# Altium PCB PCB.PcbDoc
Units mm, origin at the board's own origin, x right, y up, seen from the top; angles counter-clockwise.
Board outline 35.57 x 16.2 mm, 2 copper layers (Top Layer, Bottom Layer); 66 components, 58 nets, 239 pads, 104 vias.
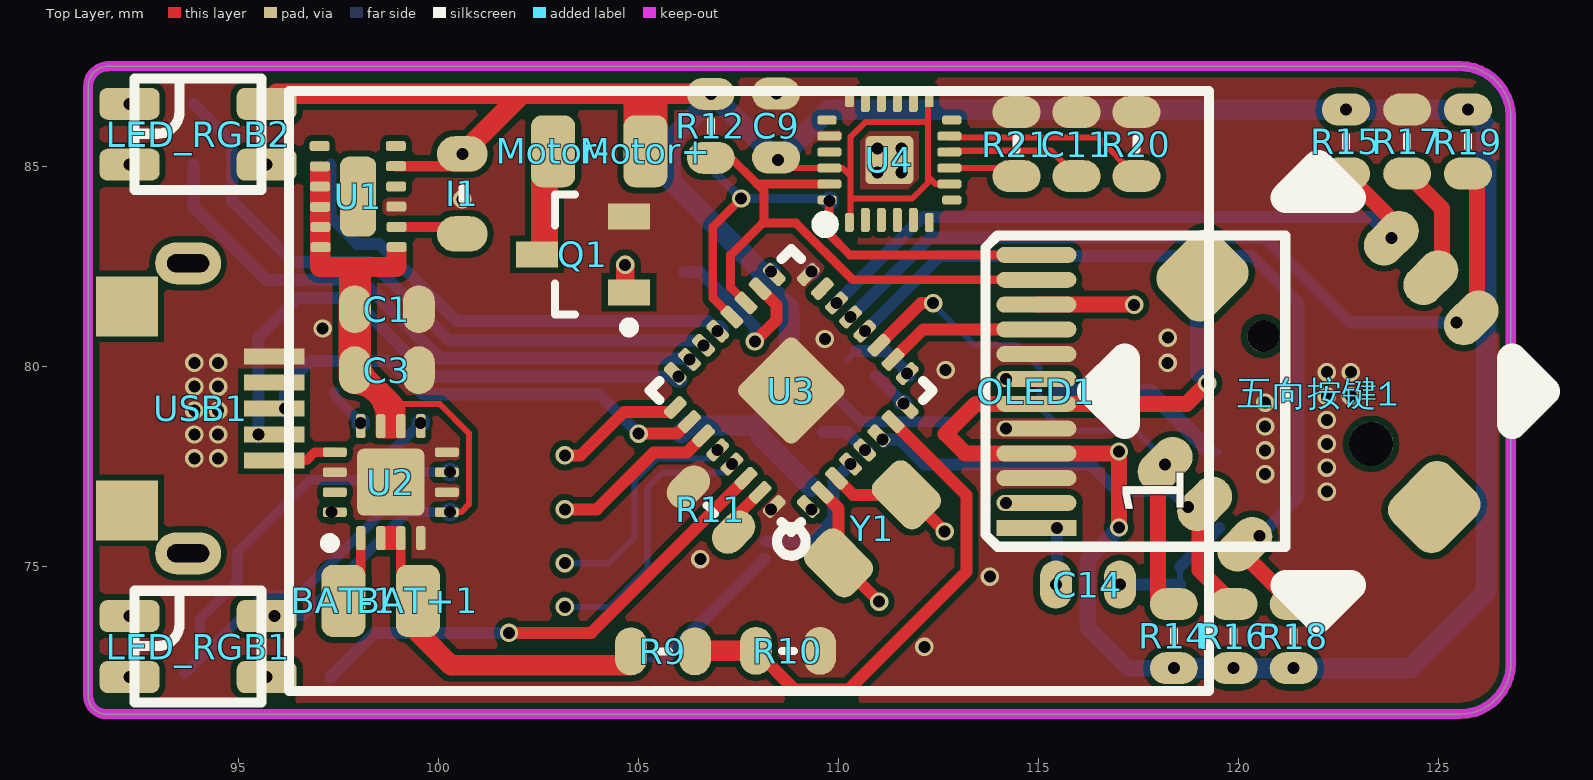
[diagram p0: Top Layer view]
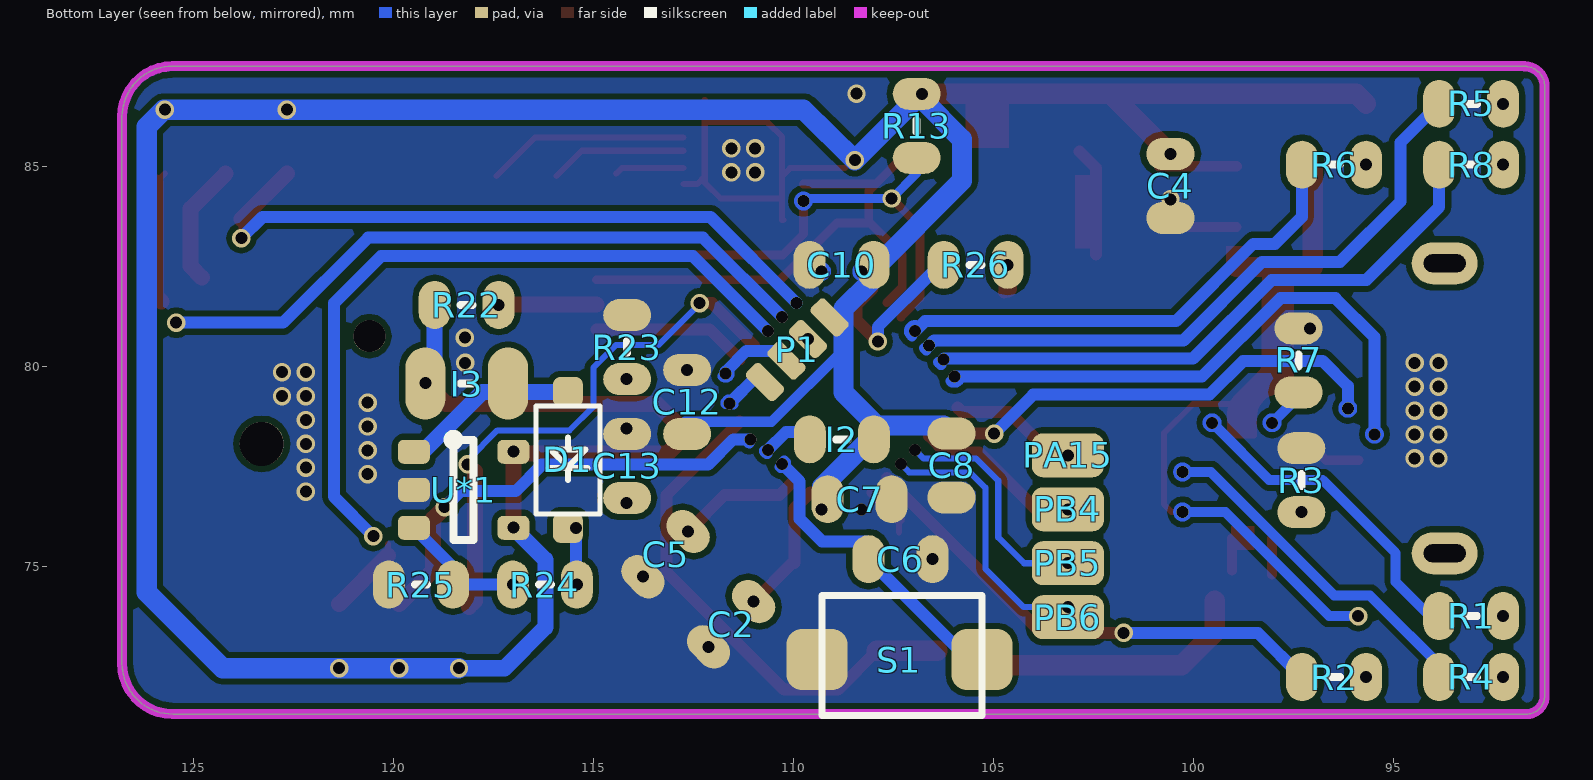
[diagram p1: Bottom Layer view, seen from below]
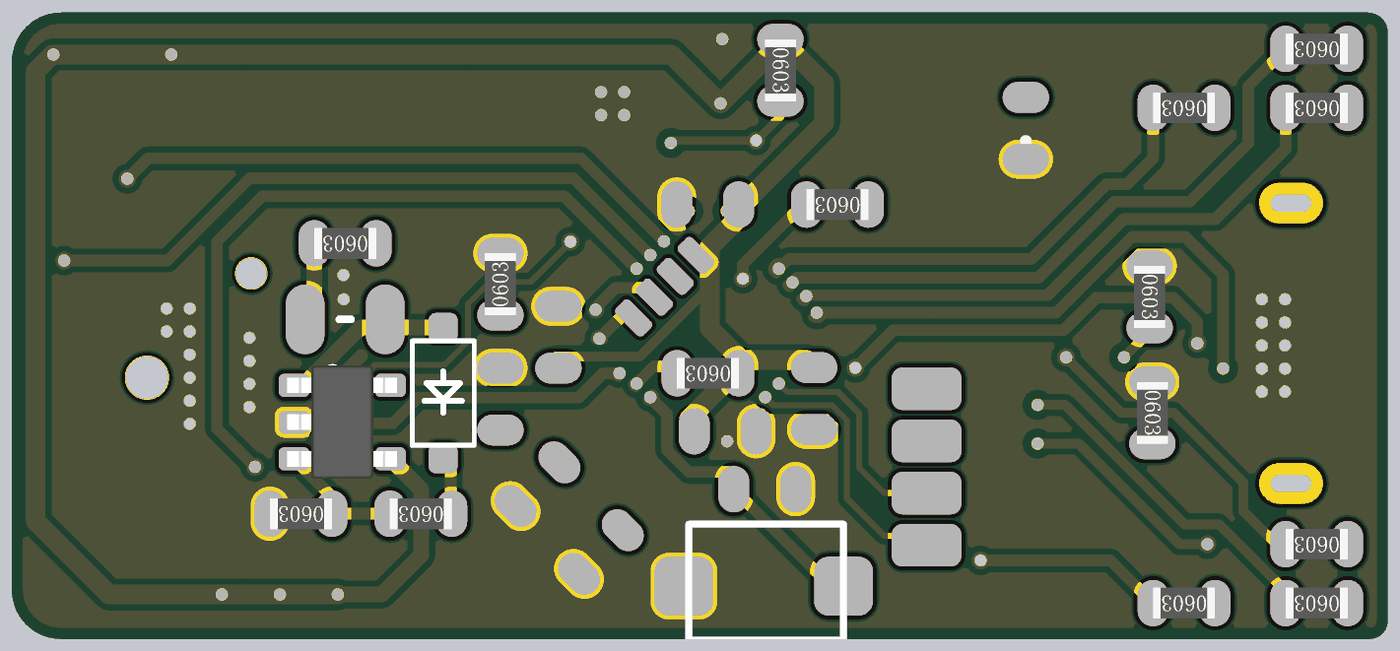
[diagram p2: 3D render of the assembled board from below, using the file's embedded part models]

## Layer stack, top to bottom
Top Solder: solder mask 0.0102, Solder Resist, Dk 3.5
Top Layer: signal copper 0.0356
Dielectric 1: dielectric 0.32, FR-4, Dk 4.8
Bottom Layer: signal copper 0.0356
Bottom Solder: solder mask 0.0102, Solder Resist, Dk 3.5

## Board outline
91.23,71.774 ccw(c91.688,71.774) 91.688,71.317 125.527,71.317 ccw(c125.527,72.587) 126.797,72.587 126.797,86.246 ccw(c125.527,86.246) 125.527,87.516 91.732,87.516 91.726,87.509 ccw(c91.726,87.014) 91.23,87.014

## Design rules (kind name [scope] priority, off if disabled: settings)
Clearance [All] p1: gap=0.152
ComponentClearance [All] p1: gap=0 collisioncheckmode=3 verticalgap=0 showdistances=FALSE
HoleSize [All] p1: absolutevalues=TRUE maxlimit=25.375 minlimit=0.025 maxpercent=80.000 minpercent=20.000
HoleToHoleClearance [All] p1: gap=0.051 allowstackedmicrovias=TRUE
MinimumSolderMaskSliver [All] p1: minsoldermaskwidth=0
PolygonConnect [All] p1: connectstyle=Direct reliefconductorwidth=0.254 reliefentries=4 polygonreliefangle="90 Angle" airgapwidth=0.254
RoutingVias [All] p1: holewidth=0.711 width=1.27 viastyle="Through Hole" minholewidth=0.025 minwidth=0.025 maxholewidth=25.375 maxwidth=25.375
SilkToSilkClearance [All] p1: silktosilkclearance=0
SilkToSolderMaskClearance [IsPad] p1: minsilkscreentomaskgap=0 clearancetoexposedcopper=TRUE
SolderMaskExpansion [All] p1: expansion=0.102
Width [All] p1: maxlimit=999 minlimit=0.152 preferedwidth=0.152
24 further rules are at their usual default settings.

## Components (designator, comment, footprint, x,y, rotation, side; value= is the part's Value field where it differs from the comment)
BAT+1 "BAT" BAT+ 99.479,74.136 r180 top
BAT-1 "BAT" BTA- 97.619,74.136 r180 top
C1 "10uF" 1__0603-CAP_ 98.698,81.439 r180 top
C2 "4.3pF" 1__0603-CAP_ 111.57,73.564 r315 bottom
C3 "4.7uF" 1__0603-CAP_ 98.698,79.915 r0 top
C4 "10uF" 1__0603-CAP_ 100.584,84.522 r270 bottom
C5 "4.3pF" 1__0603-CAP_ 113.208,75.317 r315 bottom
C6 "100nF" 1__0603-CAP_ 107.334,75.19 r0 bottom
C7 "104" 1__0603-CAP_ 108.356,76.689 r180 bottom
C8 "104" 1__0603-CAP_ 106.058,77.534 r270 bottom
C9 "104" 1__0603-CAP_ 108.428,86.031 r270 top
C10 "104" 1__0603-CAP_ 108.807,82.55 r0 bottom
C11 "104" 1__0603-CAP_ 115.938,85.566 r270 top
C12 "0.1uF" 1__0603-CAP_ 112.668,79.121 r90 bottom
C13 "4.7uF" 1__0603-CAP_ 114.167,77.521 r90 bottom
C14 "4.7pF" 1__0603-CAP_ 116.224,74.555 r180 top
D1 "Diode" 二极管1206 115.646,77.673 r90 bottom
I1 "2.2uH" 1__0805_IND 100.584,84.322 r270 top
I2 "100uH" 1__0603_IND_ 108.801,78.188 r0 bottom
I3 "6.8uH" 0805_Ind 118.18,79.581 r180 bottom
LED_RGB1 "L*" 1__LED_RGB 92.266,73.768 r0 top locked
LED_RGB2 "L*" 1__LED_RGB 92.266,86.576 r0 top locked
Motor+ "BAT" BAT+ 105.169,85.376 r180 top
Motor- "BAT" BTA- 102.857,85.376 r180 top
OLED1 "0.73_OLED" 0.73OLED 121.92,79.386 r90 top locked
P1 "蓝牙" BT 109.108,81.234 r225 bottom
PA15 "BAT" BAT+ 103.161,77.785 r90 bottom
PB4 "BAT" BAT+ 103.161,76.435 r90 bottom
PB5 "BAT" BAT+ 103.161,75.086 r90 bottom
PB6 "BAT" BAT+ 103.137,73.743 r270 bottom
Q1 "NPN-J3Y/Y1" SOT23 103.6,82.81 r180 top
R1 "4K7" 1__0603-RES_ 93.066,73.768 r0 bottom
R2 "4K7" 1__0603-RES_ 96.495,72.244 r0 bottom
R3 "1K" 1__0603-RES_ 97.313,77.164 r270 bottom
R4 "4K7" 1__0603-RES_ 93.066,72.244 r0 bottom
R5 "4K7" 1__0603-RES_ 93.065,86.576 r0 bottom
R6 "4K7" 1__0603-RES_ 96.494,85.052 r0 bottom
R7 "1K" 1__0603-RES_ 97.384,80.162 r270 bottom
R8 "4K7" 1__0603-RES_ 93.065,85.052 r0 bottom
R9 "5M" 1__0603-RES_ 105.6,72.885 r0 top
R10 "5M" 1__0603-RES_ 108.725,72.898 r0 top
R11 "10K" 1__0603-RES_ 106.801,76.43 r135 top
R12 "220K" 1__0603-RES_ 106.796,86.025 r270 top
R13 "220K" 1__0603-RES_ 106.928,86.023 r270 bottom
R14 "220K" 1__0603-RES_ 118.37,73.266 r90 top
R15 "220K" 1__0603-RES_ 122.676,85.63 r90 top
R16 "220K" 1__0603-RES_ 119.869,73.266 r90 top
R17 "330" 1__0603-RES_ 124.206,85.63 r270 top
R18 "220K" 1__0603-RES_ 121.368,73.266 r90 top
R19 "220K" 1__0603-RES_ 125.724,85.63 r90 top
R20 "10K" 1__0603-RES_ 117.437,85.566 r270 top
R21 "10K" 1__0603-RES_ 114.44,85.566 r270 top
R22 "220K" 1__0603-RES_ 118.18,81.547 r0 bottom
R23 "510K" 1__0603-RES_ 114.167,80.493 r90 bottom
R24 "1.43M" 1__0603-RES_ 116.224,74.555 r0 bottom
R25 "205K" 1__0603-RES_ 119.323,74.555 r0 bottom
R26 "10K" 1__0603-RES_ 105.454,82.55 r0 bottom
S1 "" KEY3*4*2 107.359,72.682 r180 bottom
U1 "TPS62742" TPS62742 97.98,84.255 r180 top
U2 "BQ24078" BQ24078 98.797,77.117 r90 top
U3 "STM32L432Kx" STM32L432 108.807,79.407 r135 top locked
U4 "MPU9250" "1__QFN3*3 (改1)" 111.26,85.169 r90 top
U*1 "OLED升压" 1__SOT23-5 118.256,76.925 r180 bottom
USB1 "USB-5P" "1__MICRO USB 立贴_" 96.629,78.962 r90 top locked
Y1 "32.768K" OSC32 111.697,76.791 r225 top
五向按键1 "五向按键" 1__五向按键_ 121.985,79.386 r45 top locked

## Footprints (in the part's own frame and the unit in brackets; to place one, negate y for a bottom-side part, rotate by r counter-clockwise, add the part's x,y. Pads: shape width x height; smd on the part's side, far side on the other; paste and mask are expansions set on the pad)
0.73OLED [mm]
  rect 0.4x2 smd: 1(-3.41,6.985)
  oval 0.4x2 smd: 2(-2.79,6.985) 3(-2.17,6.985) 4(-1.55,6.985) 5(-0.93,6.985) 6(-0.31,6.985) 7(0.31,6.985) 8(0.93,6.985) 9(1.55,6.985) 10(2.17,6.985) 11(2.79,6.985) 12(3.41,6.985)
  silkscreen extent -7.49,0.76 7.51,25.67
1__0603-CAP_ [mm]
  oval 0.8x1.2 smd: 1(-0.8,0) 2(0.8,0)
  body extent -0.88,-0.48 0.87,0.48, height 0.85
1__0603-RES_ [mm]
  oval 0.8x1.2 smd: 1(-0.8,0) 2(0.8,0)
  silkscreen extent -0.15,0 0.15,0, body extent -0.8,-0.4 0.8,0.4, height 0.45
1__0603_IND_ [mm]
  oval 0.8x1.2 smd: 1(-0.8,0) 2(0.8,0)
  silkscreen extent -0.15,0 0.15,0, body extent -0.8,-0.4 0.8,0.4, height 0.45
1__0805_IND [mm]
  oval 0.889x1.27 smd: 1(-1,0) 2(1,0)
  silkscreen extent -0.15,0 0.15,0, body extent -1,-0.63 1,0.63, height 0.55
1__LED_RGB [mm]
  rrect50% 1.5x0.8 smd: 1(0,0) 2(3.429,0) 3(0,-1.524) 4(3.429,-1.524)
  silkscreen extent 0.13,-2.16 3.3,0.64
"1__MICRO USB 立贴_" [mm]
  oval 1.05x1.65 hole 0.45 slot 1.05 at 90 deg: 0(-3.625,2.9) 0(3.625,2.9)
  rect 1.5x1.55 smd: 0(-2.55,4.425) 0(2.55,4.425)
  rect 0.4x1.51 smd: 1(-1.3,0.75) 2(-0.65,0.75) 3(0,0.75) 4(0.65,0.75) 5(1.3,0.75)
"1__QFN3*3 (改1)" [mm]
  rrect50% 0.48x0.22 smd: 1(-1.56,0.999) 6(-1.56,-0.999) 13(1.56,-0.999) 18(1.56,0.999)
  rrect50% 0.6x0.22 smd: 2(-1.5,0.6) 3(-1.5,0.2) 4(-1.5,-0.2) 5(-1.5,-0.6) 14(1.5,-0.6) 15(1.5,-0.2) 16(1.5,0.2) 17(1.5,0.6)
  rrect50% 0.22x0.48 smd: 7(-0.999,-1.56) 12(0.999,-1.56) 19(0.999,1.56) 24(-0.999,1.56)
  rrect50% 0.22x0.6 smd: 8(-0.6,-1.5) 9(-0.2,-1.5) 10(0.2,-1.5) 11(0.6,-1.5) 20(0.6,1.5) 21(0.2,1.5) 22(-0.2,1.5) 23(-0.6,1.5)
  rrect20% 1.2x1.2 smd: 18(0,0)
  silkscreen extent -1.83,1.39 -1.39,1.82
1__SOT23-5 [mm]
  rrect50% 0.8x0.6 smd: 1(-1.245,0.95) 2(-1.245,0) 3(-1.245,-0.95) 4(1.245,-0.95) 5(1.245,0.95)
  silkscreen extent -0.38,-1.25 0.25,1.37, body extent -1.42,-1.46 1.42,1.46
1__五向按键_ [mm]
  rrect50% 2x1.8 smd: 0(0,4.096) 0(0.004,-4.096)
  round 1.1 hole 1.1: 0(0.004,-1.861)
  round 0.8 hole 0.8: 0(0.004,1.949)
  oval 1.524x1 smd: 1(-4,1.419) 2(-4.001,0.022) 3(-4.001,-1.403) 4(4,1.419) 5(4.001,0.022) 6(4.001,-1.403)
  silkscreen extent -4,-4 4,4
0805_Ind [mm]
  oval 1x1.8 smd: 1(-1.035,0) 2(1.035,0)
  silkscreen extent -0.15,0 0.15,0, body extent -1,-0.63 1,0.63, height 0.25
BAT+ [mm]
  rrect50% 1.1x1.8 smd: 1(0.003,-0.012)
BQ24078 [mm] "充电芯片"
  rrect50% 0.6x0.24 smd: 1(-1.4,0.75) 2(-1.4,0.25) 3(-1.4,-0.25) 4(-1.4,-0.75) 9(1.4,-0.75) 10(1.4,-0.25) 11(1.4,0.25) 12(1.4,0.75)
  rrect50% 0.24x0.6 smd: 5(-0.75,-1.4) 6(-0.25,-1.4) 7(0.25,-1.4) 8(0.75,-1.4) 13(0.75,1.4) 14(0.25,1.4) 15(-0.25,1.4) 16(-0.75,1.4)
  rrect20% 1.68x1.68 smd: 8(0,0)
  silkscreen extent -1.65,1.4 -1.4,1.65
BT [mm]
  rrect50% 1x0.5 smd: 1(0,0) 2(0,-0.762) 3(0,-1.524) 4(0,-2.286)
BTA- [mm]
  rrect50% 1.1x1.8 smd: 2(0.003,-0.012)
KEY3*4*2 [mil]
  rrect50% 60x60 smd: 1(-81.24,0) 2(81.24,0)
  silkscreen extent -76,-55 81,63
OSC32 [mm]
  rrect50% 1.2x1.6 smd: 1(0.003,-0.012) 2(2.403,-0.012)
SOT23 [mm] "SOT23, 3-Leads, Body 2.90x2.40mm, Pitch 0.95mm, IPC Medium Density"
  rect 1.05x0.65 smd: 1(-1.15,0.95) 2(-1.15,-0.95) 3(1.15,0)
  silkscreen extent -1.28,-1.5 0.7,1.95, body extent -1.4,-1.45 1.4,1.45, height 1.2
STM32L432 [mm]
  rrect50% 0.6x0.3 smd: 1(-2.35,1.75) 2(-2.35,1.25) 3(-2.35,0.75) 4(-2.35,0.25) 5(-2.35,-0.25) 6(-2.35,-0.75) 7(-2.35,-1.25) 8(-2.35,-1.75) 17(2.35,-1.75) 18(2.35,-1.25) 19(2.35,-0.75) 20(2.35,-0.25) 21(2.35,0.25) 22(2.35,0.75) 23(2.35,1.25) 24(2.35,1.75)
  rrect50% 0.3x0.6 smd: 9(-1.75,-2.35) 10(-1.25,-2.35) 11(-0.75,-2.35) 12(-0.25,-2.35) 13(0.25,-2.35) 14(0.75,-2.35) 15(1.25,-2.35) 16(1.75,-2.35) 25(1.75,2.35) 26(1.25,2.35) 27(0.75,2.35) 28(0.25,2.35) 29(-0.25,2.35) 30(-0.75,2.35) 31(-1.25,2.35) 32(-1.75,2.35)
  rrect20% 2x2 smd: 32(0,0)
  silkscreen extent -3.03,-2.5 2.5,3.03
TPS62742 [mm] "稳压芯片"
  rrect50% 0.9x2 smd: 0(0,0)
  rrect50% 0.5x0.25 smd: 1(-0.961,1.261) 2(-0.958,0.756) 3(-0.954,0.251) 4(-0.95,-0.254) 5(-0.946,-0.759) 6(-0.942,-1.264) 7(0.961,-1.261) 8(0.958,-0.756) 9(0.954,-0.251) 10(0.95,0.254) 11(0.946,0.759) 12(0.942,1.264)
二极管1206 [mm]
  rrect50% 0.75x0.75 smd: 1(1.7,0) 2(-1.7,0)
  silkscreen extent -1.35,-0.8 1.35,0.8

## Part data
C1 C2 C3 C4 C5 C6 C7 C8 C9 C10 C11 C12 C13 C14: library part Cap, "Capacitor"
D1: "Default Diode"
I1 I2 I3: library part 电感
LED_RGB1 LED_RGB2: library part LED_RGB
P1: library part "Header 4", "Header, 4-Pin"
Q1: library part "NPN BC817-40", "NPN Bipolar Transistor"
R1 R2 R3 R4 R5 R6 R7 R8 R9 R10 R11 R12 R13 R14 R15 R16 R17 R18 R19 R20 R21 R22 R23 R24 R25 R26: library part Res2, "Resistor"
S1: library part SW-PB, "Switch"
U1: "锂电池稳压"
U2: "充电芯片"
U3: "单片机"
U*1: library part TPS61040
USB1: "USB CONNECTOR"
Y1: library part XTAL, "Crystal Oscillator"

## Via types
v1: diameter 0.46, hole 0.3, Top Layer to Bottom Layer, tented both sides, 74 vias
v2: diameter 0.3, hole 0.3, Top Layer to Bottom Layer, tented both sides, 30 vias

## Nets (pads, with @x,y where several pads share a name; then routed paths per layer and width w, separated by ;. In a path a pad name is that pad's centre, name@x,y a point inside that pad or via, vN(x,y) a via of type N, cw(c..) or ccw(c..) an arc to the next point about the centre after c; other vN are vias at no path point)
ADC: R9.2 R10.1 U3.7 | length 12.9
  Top Layer w0.152: R9.2 R9.2@106.413,72.898
  Top Layer w0.3: R10.1 108.89,71.933 110.249,71.933 113.189,74.873 113.189,76.793 U3.7
  Top Layer w0.508: R9.2@106.413,72.898 R10.1
BAT-POWER: BAT+1.1 R9.1 U2.2 U2.3 | length 7.2
  Top Layer w0.24: BAT+1.1@99.047,74.905 U2.3
  Top Layer w0.508: BAT+1.1 99.476,73.362 100.299,72.539 R9.1@104.76,72.539
BOOT0: R11.1 U3.31 | length 1.3
  Top Layer w0.152: R11.1 R11.1@107.366,76.198
  Top Layer w0.3: R11.1@107.366,76.198 U3.31
Charging-STA: R1.2 U2.9 | length 8.9
  Bottom Layer w0.254: R1.2@94.028,73.454 94.028,73.695 94.958,74.625 94.958,75.349 96.78,77.172 98.115,77.172 v2@99.468,78.524 ; v2(99.544,78.6) v2@99.468,78.524 ; v2@99.468,78.524 cw(c99.544,78.6) 99.652,78.6 cw(c99.544,78.6) v2@99.468,78.524
GND: C1.1 C2.2 C3.2 C4.2 C5.2 C6.1 C7.2 C8.2 C9.1 C10.2 C11.1 C12.2 C13.2 OLED1.3 OLED1.5 OLED1.8 P1.2 Q1.2 R3.1 R7.1 R10.2 R11.2 R17.1 R20.1 R21.1 R23.2 R25.2 S1.1 U1.3 U2.4 U2.6 U2.8 U2.14 U3.16 U3.32 U4.18 U4.20 U*1.2 USB1.5 | length 1.3
  Top Layer w0.152: v1(108.433,86.83) C9.1@108.553,86.709 ; U3.32@108.807,79.407 U3.32@108.807,79.856
  Bottom Layer w0.254: C10.2@109.417,82.385 ccw(c109.309,82.385) C10.2@109.417,82.385
  other v1: 112.136,72.999 113.773,74.752 106.534,75.19 122.199,76.879 120.656,77.314 122.199,77.476 93.885,77.711 94.482,77.711 120.656,77.911 122.199,78.073 93.885,78.308 94.482,78.308 120.656,78.508 122.199,78.67 93.885,78.905 94.482,78.905 120.656,79.105 122.199,79.267 122.796,79.267 93.885,79.502 94.482,79.502 122.199,79.864 122.796,79.864 112.668,79.921 93.885,80.099 94.482,80.099 118.218,80.099 109.646,80.695 118.224,80.728 97.091,80.956 100.584,84.188 110.968,84.863 111.565,84.863 110.968,85.46 111.565,85.46
  other v2: 108.306,76.429 114.179,78.459 109.309,82.385
KEY-Down: R19.1 U3.13 五向按键1.6 | length 20.2
  Top Layer w0.152: R19.1 R19.1@125.952,84.601
  Top Layer w0.4: 五向按键1.6@125.806,81.629 125.952,81.775 R19.1@125.952,84.601
  Bottom Layer w0.3: v2(110.292,81.245) 112.276,83.229 120.644,83.229 122.771,81.102 v1(125.444,81.102)
KEY-Left: R18.2 U3.12 五向按键1.3 | length 20.3
  Top Layer w0.152: 五向按键1.3@120.149,75.285 五向按键1.3
  Top Layer w0.4: 五向按键1.3@120.149,75.285 R18.2
  Bottom Layer w0.3: v2(110.646,80.892) 112.52,82.766 120.32,82.766 121.495,81.591 121.495,76.752 v1(120.51,75.768)
KEY-Right: R15.1 U3.14 五向按键1.4 | length 17.1
  Top Layer w0.152: v1(123.811,83.218) 五向按键1.4@123.811,83.695
  Top Layer w0.4: R15.1 五向按键1.4@123.811,83.695
  Bottom Layer w0.3: v2(109.939,81.599) 112.084,83.744 123.285,83.744 v1(123.811,83.218)
KEY-Up: R14.2 U3.11 五向按键1.1 | length 13.6
  Top Layer w0.152: U3.11 U3.11@110.999,80.589 ; 五向按键1.1@117.977,77.384 v1(118.153,77.561)
  Top Layer w0.3: U3.11 112.052,81.591 v1(112.357,81.591)
  Top Layer w0.4: 五向按键1.1@117.977,77.384 117.977,74.143 R14.2@118.123,73.997
  Bottom Layer w0.152: v1@112.347,81.582 113.38,80.549 114.44,80.549 115.011,79.978 115.011,79.007 115.608,78.41 117.412,78.41 118.153,77.668 v1(118.153,77.561)
LED: R2.2 U3.30 | length 12.4
  Top Layer w0.3: v1(101.752,73.349) 103.81,73.349 U3.30
  Bottom Layer w0.3: R2.2 98.399,73.349 v1(101.752,73.349)
LED1: R6.2 U3.21 | length 12.6
  Bottom Layer w0.254: v2@106.888,81.017 cw(c106.969,80.892) v2@107.045,80.764
  Bottom Layer w0.3: R6.2 97.294,83.75 97.97,83.075 98.511,83.075 100.446,81.14 106.72,81.14 v2(106.969,80.892)
LED2: R5.2 U3.22 | length 16.2
  Bottom Layer w0.254: v2@106.692,80.411 ccw(c106.615,80.538) v2@106.749,80.473
  Bottom Layer w0.3: R5.2 94.831,85.61 94.831,84.138 96.345,82.623 98.295,82.623 100.259,80.658 106.495,80.658 v2(106.615,80.538)
LED3: R8.2 U3.23 | length 15.2
  Bottom Layer w0.254: v2@106.306,80.043 ccw(c106.262,80.185) v2@106.395,80.119
  Bottom Layer w0.3: R8.2 93.865,83.995 95.69,82.171 98.056,82.171 100.02,80.206 106.24,80.206 v2(106.262,80.185)
Motor: R26.2 U3.18 | length 4.4
  Top Layer w0.3: v1(107.899,80.632) 108.433,81.166 108.433,81.549 U3.18
  Bottom Layer w0.3: R26.2@106.14,82.366 106.534,82.366 107.899,81.001 v1(107.899,80.632)
NetBAT+1_2: 
NetBAT-1_2: BAT-1.2 U2.1 | length 0.9
  Top Layer w0.24: BAT-1.2@98.047,74.797 U2.1
NetC11_2: C11.2 U4.10 | length 3.4
  Top Layer w0.152: U4.10@112.763,85.401 115.303,85.401 C11.2
NetC13_1: C13.1 OLED1.2
  other v2: 114.179,76.594
NetC14_1: C14.1 R24.2 R25.1 U*1.3 | length 3.3
  Bottom Layer w0.152: R25.1 R25.1@118.523,74.997
  Bottom Layer w0.3: v1(117.024,74.555) R25.1 ; R25.1@118.523,74.997 U*1.3
NetC14_2: C14.2 D1.2 OLED1.1 R24.1 | length 1.4
  Bottom Layer w0.152: v1(115.424,74.555) R24.1@115.449,74.581
  Bottom Layer w0.3: R24.1@115.449,74.581 v2(115.449,75.973)
NetD1_1: D1.1 I3.2 U*1.1 | length 4.7
  Bottom Layer w0.152: U*1.1@119.28,77.875 U*1.1
  Bottom Layer w0.254: D1.1@115.449,79.373 D1.1
  Bottom Layer w0.4: D1.1 117.782,79.373 U*1.1@119.28,77.875
NetI1_2: I1.2 U1.2 | length 1.3
  Top Layer w0.254: U1.2 I1.2@100.247,83.499
NetI2_2: I2.2 U3.5 | length 1.3
  Bottom Layer w0.254: v2@110.661,77.823 ccw(c110.646,77.922) v2@110.744,77.906
  Bottom Layer w0.3: I2.2@109.607,78.365 110.202,78.365 v2(110.646,77.922)
NetLED_RGB1_1: LED_RGB1.1 R1.1
  other v1: 92.266,73.768
NetLED_RGB1_3: LED_RGB1.3 R4.1
  other v1: 92.266,72.244
NetLED_RGB1_4: LED_RGB1.4 R2.1
  other v1: 95.695,72.244
NetLED_RGB2_1: LED_RGB2.1 R5.1
  other v1: 92.266,86.576
NetLED_RGB2_3: LED_RGB2.3 R8.1
  other v1: 92.266,85.052
NetLED_RGB2_4: LED_RGB2.4 R6.1
  other v1: 95.694,85.052
NetMotor+_2: 
NetMotor-_2: Motor-.2 Q1.3 | length 2.7
  Top Layer w0.3: Q1.3 102.45,84.975 Motor-.2@102.864,85.388
NetOLED1_7: OLED1.7 R23.1
  other v2: 114.179,79.699
NetOLED1_10: OLED1.10 R22.1 | length 2.4
  Top Layer w0.152: v1@117.37,81.556 v1(117.38,81.547)
  Top Layer w0.4: OLED1.10 v1@117.37,81.556
NetPA15_1: PA15.1 U3.25 | length 3.3
  Top Layer w0.3: v1(103.149,77.787) 103.543,77.787 104.623,78.867 105.793,78.867 U3.25
NetPB4_1: PB4.1 U3.27 | length 4.2
  Top Layer w0.3: v1(103.149,76.438) 103.946,76.438 105.366,77.857 106.197,77.857 U3.27
NetPB5_1: PB5.1 U3.28 | length 5.8
  Bottom Layer w0.152: v1(103.149,75.089) 104.242,75.089 104.889,75.736 104.889,77.153 105.442,77.705 106.752,77.705 v2(106.969,77.922)
NetPB6_1: PB6.1 U3.29 | length 6.8
  Bottom Layer w0.152: PB6.1@103.143,73.99 104.254,73.99 105.213,74.949 105.213,76.978 105.597,77.362 107.116,77.362 v2(107.322,77.568)
  other v1: 103.149,73.997
NetQ1_1: Q1.1 R26.1 | length 0.7
  Top Layer w0.3: Q1.1@104.654,81.956 Q1.1
  Top Layer w0.46: Q1.1@104.654,81.956 v1(104.654,82.55)
NetR3_2: R3.2 U2.16
  other v2: 97.313,76.364
NetR7_2: R7.2 U2.12 | length 1.7
  Bottom Layer w0.254: R7.2 ccw(c97.629,79.362) 97.455,79.189 v2(98.044,78.6) ; v2@98.152,78.6 ccw(c98.044,78.6) v2@98.152,78.6
NetR17_2: R17.2 五向按键1.5 | length 3.1
  Top Layer w0.4: R17.2 125.082,83.954 125.082,82.514 五向按键1.5
NetR20_2: R20.2 U4.11 | length 5.1
  Top Layer w0.152: U4.11@112.763,85.737 116.466,85.737 R20.2
NetR21_2: R21.2 U4.9 | length 1.7
  Top Layer w0.152: U4.9 114.3,84.969 R21.2@114.44,84.83
NRST: C6.2 S1.2 U3.4 | length 7.7
  Bottom Layer w0.152: S1.2 S1.2@105.626,72.682
  Bottom Layer w0.254: v2@110.238,77.652 ccw(c110.292,77.568) v2@110.358,77.493
  Bottom Layer w0.3: S1.2@105.626,72.682 C6.2 ; C6.2@108.166,75.635 109.296,75.635 109.859,76.198 109.859,77.135 v2(110.292,77.568)
OLED-RST: OLED1.9 U3.10 | length 3.9
  Top Layer w0.3: U3.10 112.104,80.936 OLED1.9
OSC32-IN: C2.1 U3.2 Y1.2 | length 3.3
  Top Layer w0.152: Y1.2 Y1.2@110.034,75.1
  Top Layer w0.3: U3.2 109.989,76.457 Y1.2 ; Y1.2@110.034,75.1 v1(111.004,74.13)
OSC32-OUT: C5.1 U3.3 Y1.1 | length 3.3
  Top Layer w0.152: Y1.1 Y1.1@111.728,76.797
  Top Layer w0.3: U3.3 110.356,76.797 Y1.1 ; Y1.1@111.728,76.797 v1(112.642,75.883)
POWER: C1.2 C3.1 LED_RGB1.2 U1.1 U1.8 U1.9 U1.10 U1.11 U1.12 U2.5 U2.10 U2.11 | length 18
  Top Layer w0.152: 98.889,79.07 100.019,79.07 100.749,78.34 100.749,76.562 100.554,76.367 U2.5
  Top Layer w0.24: U2.11 98.547,79.266
  Top Layer w0.254: U1.8 97.023,83.028 ccw(c97.075,83.028) U1.12 97.038,82.785 ; C3.1 C1.2
  Top Layer w0.5: 97.022,82.493 98.938,82.493
  Top Layer w0.8: C1.2 97.898,82.277
  Bottom Layer w0.254: v1(95.891,73.768) 96.615,73.768 99.217,76.369 v2(100.28,76.369) ; v2@100.388,76.369 ccw(c100.28,76.369) v2@100.388,76.369
SCL: OLED1.11 R12.2 U3.19 U4.23 | length 13.8
  Top Layer w0.22: R12.2@107.226,85.338 107.226,85.296 107.953,84.569 ; U3.19 107.29,81.985 107.29,82.791 108.09,83.591 ; U4.23 108.902,84.569 107.953,84.569 ; OLED1.11 110.343,82.176 108.928,83.591 108.128,83.591 108.128,84.395 107.953,84.569
SDA: OLED1.12 R13.2 U3.20 U4.24 | length 13.8
  Top Layer w0.22: U3.20 106.845,81.722 106.845,83.496 v1(107.556,84.207) ; v2(109.76,84.144) 109.76,83.312 110.276,82.796 OLED1.12
  Bottom Layer w0.152: R13.2@106.928,84.836 R13.2
  Bottom Layer w0.22: R13.2@106.928,84.836 v1(107.556,84.207) v2@109.76,84.207
  Bottom Layer w0.254: v2@109.868,84.144 ccw(c109.76,84.144) v2@109.868,84.144
SWCLK: U3.24 USB1.2 | length 15.1
  Bottom Layer w0.254: v2@105.861,79.675 ccw(c105.987,79.754) v2@106.085,79.642 ; v2@95.593,78.312 ccw(c95.485,78.312) v2@95.593,78.312
  Bottom Layer w0.3: v2(95.485,78.312) 95.485,80.74 96.463,81.718 97.834,81.718 99.799,79.754 v2(105.987,79.754)
SWDIO: U3.26 USB1.3 | length 12.5
  Top Layer w0.3: v1(104.991,78.327) 105.96,78.327 U3.26
  Bottom Layer w0.254: v2@96.152,79.07 ccw(c96.152,78.962) 96.26,78.962 ccw(c96.152,78.962) v2@96.152,79.07
  Bottom Layer w0.3: v2(96.152,78.962) 96.152,79.07 96.152,79.515 96.78,80.143 98.769,80.143 99.612,79.301 104.017,79.301 v1(104.991,78.327)
UART-RX: P1.3 U3.9 | length 2.2
  Bottom Layer w0.152: P1.3 P1.3@110.42,80.391 ; v2(111.706,79.831) v2@111.706,79.878
  Bottom Layer w0.254: v2@111.617,79.876 ccw(c111.706,79.831) v2@111.787,79.772
  Bottom Layer w0.3: P1.3@110.42,80.391 110.427,80.398 111.186,80.398 v2@111.706,79.878
UART-TX: P1.4 U3.8 | length 1.3
  Bottom Layer w0.254: v2@111.511,79.059 cw(c111.608,79.083) v2@111.707,79.07
  Bottom Layer w0.3: P1.4@110.925,79.766 v2(111.608,79.083)
USB-POWER: U2.13 USB1.1 | length 1.6
  Top Layer w0.24: USB1.1 96.69,77.662 96.895,77.867 U2.13
USB-STA: R4.2 U2.7 | length 9.4
  Bottom Layer w0.254: R4.2@93.643,72.326 95.599,74.282 96.488,74.282 99.575,77.369 v2(100.28,77.369) ; v2@100.388,77.369 ccw(c100.28,77.369) v2@100.388,77.369
VCC: C4.1 C7.1 C8.1 C9.2 C10.1 C12.1 I1.1 I2.1 I3.1 LED_RGB2.2 Motor+.1 OLED1.4 OLED1.6 P1.1 R12.1 R13.1 R14.1 R15.2 R16.1 R18.1 R19.2 R22.2 U1.5 U3.1 U3.17 U4.1 U4.8 U4.13 U4.22 U*1.4 U*1.5 | length 107.5
  Top Layer w0.152: v1(108.477,85.166) 108.491,85.187 C9.2@108.521,85.23 ; C9.2@108.725,84.969 U4.22 110.09,84.969 110.293,84.766 ; U4.1@110.26,83.669 U4.1@110.289,83.669 ; U4.1@110.293,83.668 110.293,84.207 ; U4.13@112.227,86.671 112.227,86.118 ; U4.8 112.421,84.569 112.227,84.763 ; v1@116.955,77.836 v1(117.002,77.884) ; 110.293,84.207 111.83,84.207 112.227,84.604 112.227,84.763 ; 110.293,84.207 110.293,84.766 ; 110.293,84.766 110.293,85.75 110.662,86.118 112.227,86.118 ; 112.227,84.763 112.227,86.118
  Top Layer w0.254: U1.5 I1.1@100.863,85.014
  Top Layer w0.4: v1@116.955,77.836 OLED1.4 113.153,77.836 112.668,78.321 113.423,79.076 OLED1.6 118.692,79.076 v1(119.206,79.59) ; v1(117.002,75.984) v1(117.002,77.884)
  Top Layer w0.508: LED_RGB2.2 95.942,86.823 102.086,86.823 ; v1(100.584,85.322) 102.086,86.823 ; v1(106.796,86.825) 102.087,86.825 102.086,86.823
  Bottom Layer w0.152: v1(106.796,86.825) R13.1@106.964,86.825 ; I2.1@108.007,78.454 I2.1@108.137,78.324 ; C10.1@108.007,82.182 C10.1@108.007,82.442 ; I3.1@118.98,79.816 v1(119.206,79.59)
  Bottom Layer w0.254: 108.756,80.429 110.56,78.626 C12.1@112.725,78.626 ; v2@108.412,82.383 ccw(c108.304,82.383) v2@108.412,82.383
  Bottom Layer w0.4: I3.1@118.98,79.816 R22.2
  Bottom Layer w0.406: U*1.4 116.211,75.175 116.211,73.489 117.234,72.466 v1(118.37,72.466)
  Bottom Layer w0.508: C8.1 106.255,78.53 107.931,78.53 108.756,79.356 108.756,80.429 108.756,81.458 C10.1@108.071,82.144 ; v1(106.796,86.825) 106.796,86.691 105.797,85.693 105.797,84.652 C10.1@108.007,82.442 ; R13.1@106.964,86.825 106.964,86.679 v1(108.477,85.166) 109.76,86.43 v1(122.676,86.43) v1(125.724,86.43) 125.749,86.43 126.181,85.998 126.181,74.365 124.282,72.466 v1(121.368,72.466) v1(119.869,72.466) v1(118.37,72.466) ; I2.1@108.055,78.241 C7.1@109.293,77.003
  other v2: 109.311,76.43 108.304,82.383
WK-UP: R16.2 U3.6 五向按键1.2 | length 11.3
  Top Layer w0.4: v1(118.732,76.492) 119.018,76.206 119.018,74.917 R16.2
  Bottom Layer w0.254: v2@111.111,78.091 ccw(c111.087,78.188) v2@111.153,78.112
  Bottom Layer w0.3: v2(111.087,78.188) 111.512,78.188 112.143,77.557 116.309,77.557 116.309,77.538 116.954,76.892 118.332,76.892 v1(118.732,76.492)
pads on no net: U1.0 U1.4 U1.6 U1.7 U2.15 U3.15 U4.2 U4.3 U4.4 U4.5 U4.6 U4.7 U4.12 U4.14 U4.15 U4.16 U4.17 U4.19 U4.21 USB1.0 USB1.4 五向按键1.0

## Polygon pours and split planes (outlines as drawn)
GND on Bottom Layer "Bottom Layer-GND" (solid, pour order 4): 91.726,87.509 91.732,87.516 125.527,87.516 cw(c125.527,86.246) 126.797,86.246 126.797,72.587 cw(c125.527,72.587) 125.527,71.317 91.713,71.317 cw(c91.713,71.799) 91.23,71.799 91.23,87.014 cw(c91.726,87.014)
GND on Top Layer "Top Layer-GND" (solid, pour order 6): 91.732,87.516 125.527,87.516 cw(c125.527,86.246) 126.797,86.246 126.797,72.587 cw(c125.527,72.587) 125.527,71.317 91.688,71.317 cw(c91.688,71.774) 91.23,71.774 91.23,87.014 cw(c91.732,87.014)

## Keep-outs
Keep-Out Layer:
  lines w0.254: 91.726,87.509 ccw(c91.726,87.014) 91.23,87.014 91.23,71.774 ccw(c91.688,71.774) 91.688,71.317 125.527,71.317 ccw(c125.527,72.587) 126.797,72.587 126.797,86.246 ccw(c125.527,86.246) 125.527,87.516 91.732,87.516

## Other copper
Top Layer:
  rectangle net POWER: 96.774,82.493 97.288,84.982
  rectangle net POWER: 98.692,82.493 99.193,83.02
  rectangle net BAT-POWER: 98.489,75.419 99.066,76.016
  rectangle net NetMotor-_2: 102.305,82.963 102.972,84.792
  rectangle net VCC: 104.616,85.471 105.715,86.938
  region: 98.419,78.835
  region: 97.335,83.001
  region net POWER: 98.425,78.74 ccw(c97.843,78.74) 97.843,79.322 cw(c97.898,79.718) 97.498,79.718 97.498,81.636 cw(c97.898,81.636) 97.898,82.036 cw(c97.898,81.636) 98.298,81.636 98.298,80.099 ccw(c98.605,80.099) 98.388,79.882 98.977,79.292 cw(c98.533,78.848) 99.162,78.848 99.162,78.27 cw(c99.111,78.27) 99.111,78.219 98.482,78.219 cw(c98.482,78.276) 98.425,78.276

## Silkscreen, mask and mechanical layers (free items; w line width, h text height)
Top Solder:
  lines w0.24: 98.047,74.797 98.047,75.717 ; 99.047,74.905 99.047,75.717
  lines w0.254: 95.879,77.662 96.69,77.662 96.895,77.867 97.397,77.867 ; 98.927,85.014 100.863,85.014 ; 98.938,83.499 100.247,83.499

## Text inside footprints (layer, text, board x,y; h text height)
OLED1: Top Overlay "1" at 118.618,76.211 h1.52 r90